# Altium PCB freq_conv_test_unit_pcb.PcbDoc
Units mm, origin at the board's own origin, x right, y up, seen from the top; angles counter-clockwise.
Board outline 201.17 x 122.05 mm, 2 copper layers (Top Layer, Bottom Layer); 15 components, 0 nets, 66 pads, 0 vias.
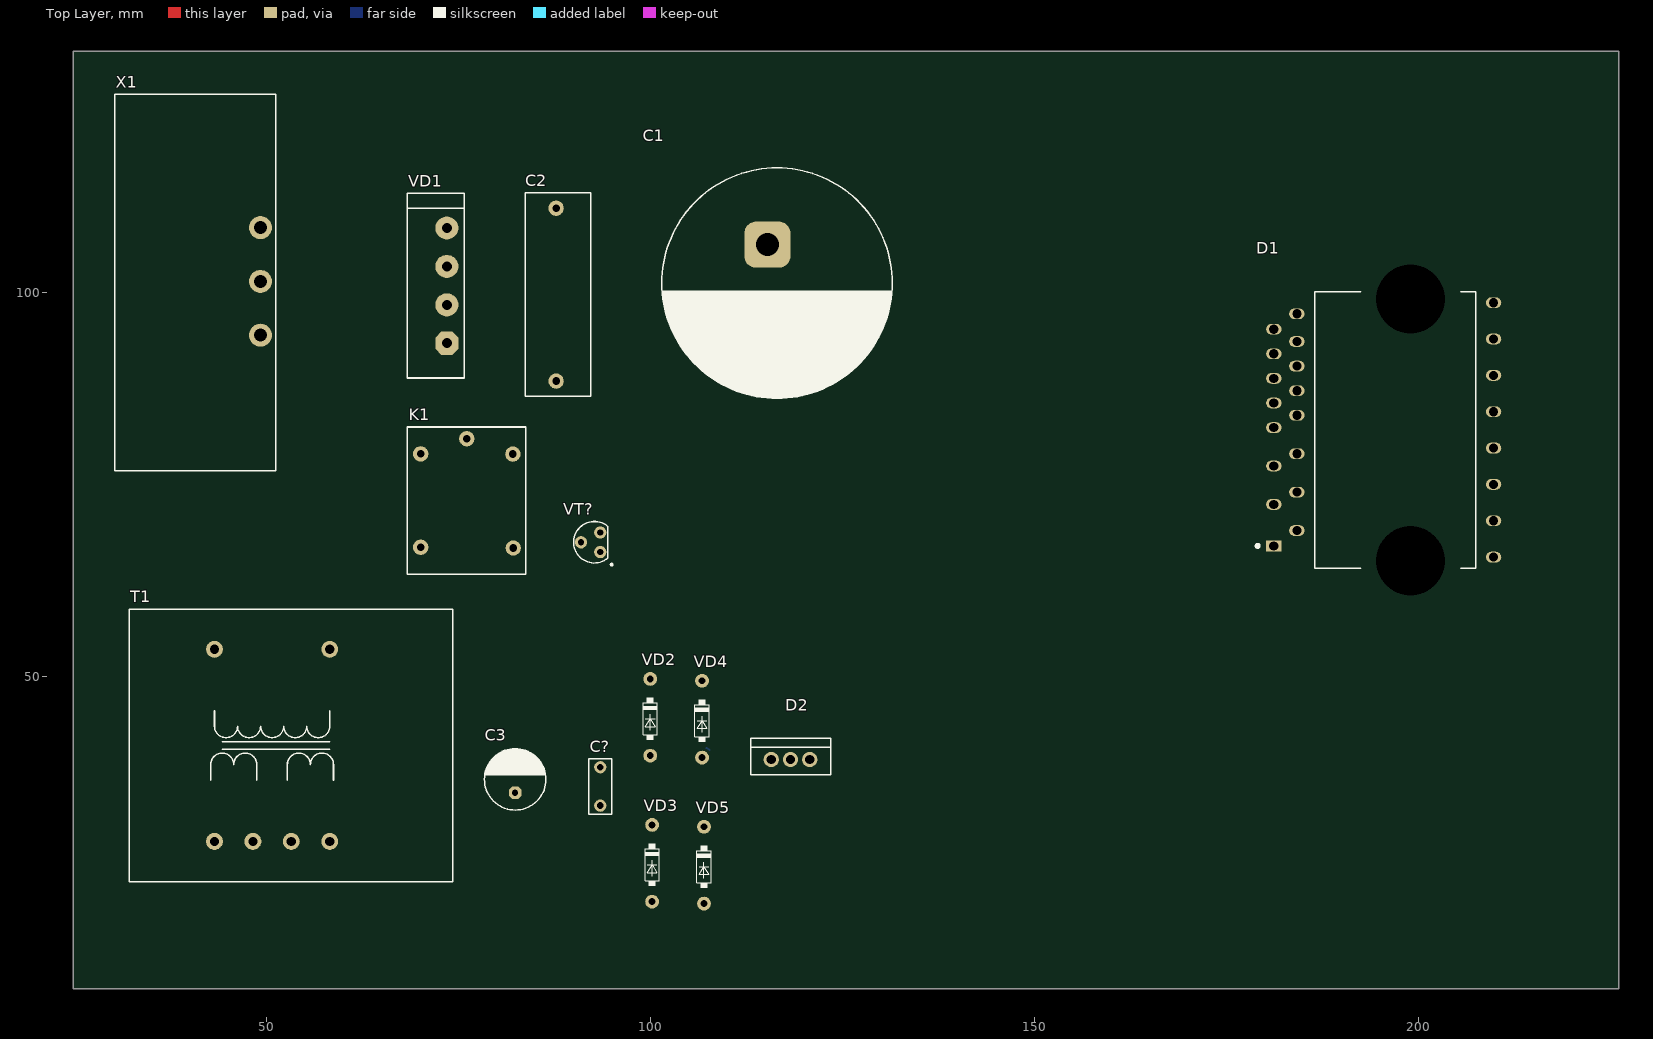
[diagram p0: Top Layer view]
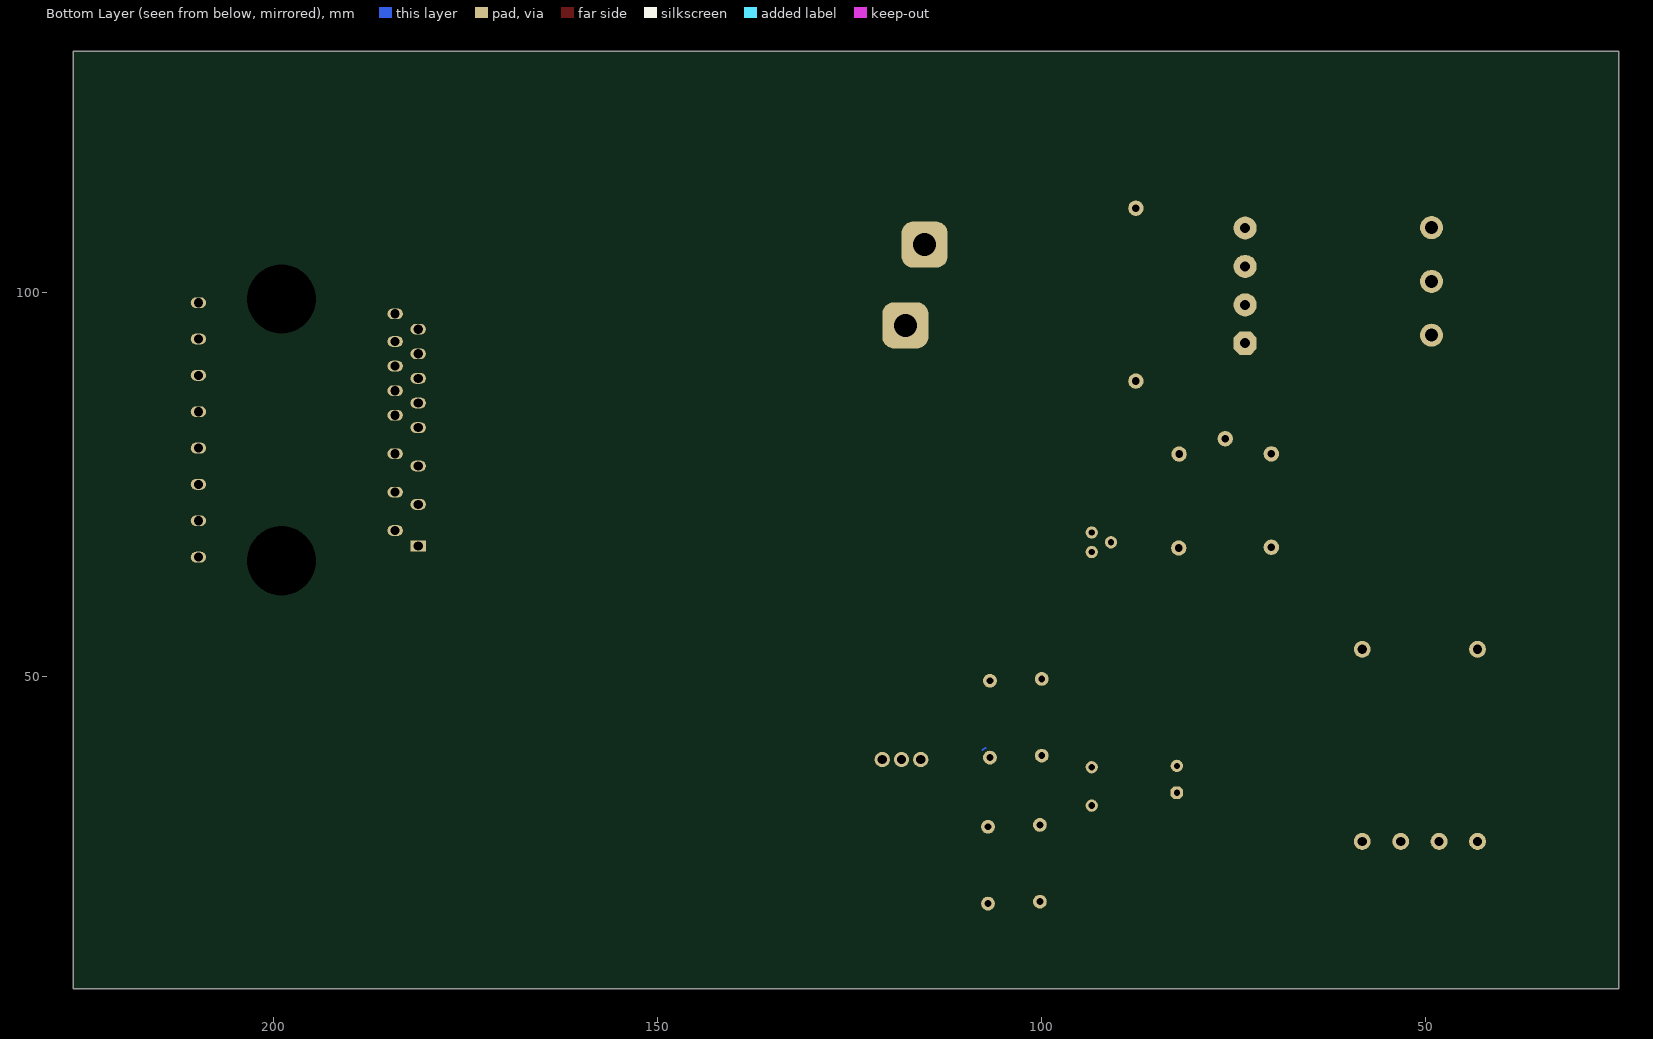
[diagram p1: Bottom Layer view, seen from below]

## Layer stack, top to bottom
Top Solder: solder mask 0.0102, Solder Resist, Dk 3.5
Top Layer: signal copper 0.0356
Dielectric 1: dielectric 0.32, FR-4, Dk 4.8
Bottom Layer: signal copper 0.0356
Bottom Solder: solder mask 0.0102, Solder Resist, Dk 3.5

## Board outline
24.892,9.398 24.892,131.445 226.06,131.445 226.06,9.398

## Design rules (kind name [scope] priority, off if disabled: settings)
AcuteAngle [All] p1: minimum=3.50000000000000E+0001 checktracksonly=FALSE
BoardOutlineClearance "BoardOutlineClearance 1" [All] p1: gap=0.25 ignorepadtopadclearanceinfootprint=FALSE except(0: Arc-SplitContinuation Track-SplitContinuation SMDPad-SplitContinuation THPad-SplitContinuation Via-SplitContinuation Fill-SplitContinuation Poly-SplitContinuation Region-SplitContinuation Text-SplitContinuation) // Milling
BoardOutlineClearance "BoardOutlineClearance 2" [All] p2: gap=0.4 ignorepadtopadclearanceinfootprint=FALSE except(0: Arc-SplitContinuation Track-SplitContinuation SMDPad-SplitContinuation THPad-SplitContinuation Via-SplitContinuation Fill-SplitContinuation Poly-SplitContinuation Region-SplitContinuation Text-SplitContinuation) // V-Cut
Clearance "Clearance 3 Oz" [All] p1: gap=0.35 ignorepadtopadclearanceinfootprint=FALSE except(0.25: Arc-Hole Track-Hole SMDPad-Hole THPad-Hole Via-Hole Fill-Hole Poly-Hole Region-Hole Text-Hole)
Clearance "Clearance 2 Oz" [All] p2: gap=0.3 ignorepadtopadclearanceinfootprint=FALSE except(0.25: Arc-Hole Track-Hole SMDPad-Hole THPad-Hole Via-Hole Fill-Hole Poly-Hole Region-Hole Text-Hole)
Clearance "Clearance-1 1 Oz" [All] p3: gap=0.2 ignorepadtopadclearanceinfootprint=FALSE except(0.25: Arc-Hole Track-Hole SMDPad-Hole THPad-Hole Via-Hole Fill-Hole Poly-Hole Region-Hole Text-Hole) // Standart
Clearance "Clearance-2 1 Oz" [All] p4: gap=0.15 ignorepadtopadclearanceinfootprint=FALSE except(0.2: Arc-Fill Arc-Poly Track-Fill Track-Poly SMDPad-Fill SMDPad-Poly THPad-Fill THPad-Poly Via-Fill Via-Poly Fill-Fill Fill-Poly Poly-Poly; 0.25: Arc-Hole Track-Hole SMDPad-Hole THPad-Hole Via-Hole Fill-Hole Poly-Hole Region-Hole Text-Hole) // Advance
Clearance "Clearance-1 1/2 Oz" [All] p5: gap=0.125 ignorepadtopadclearanceinfootprint=FALSE except(0.2: Arc-Fill Arc-Poly Track-Fill Track-Poly SMDPad-SMDPad SMDPad-Fill SMDPad-Poly THPad-Fill THPad-Poly Via-Fill Via-Poly Fill-Fill Fill-Poly Poly-Poly Poly-Region Poly-Text; 0.25: Arc-Hole Track-Hole SMDPad-Hole THPad-Hole Via-Hole Fill-Hole Poly-Hole Region-Hole Text-Hole) // Standart
Clearance "Clearance-2 1/2 Oz" [All] p6: gap=0.1 ignorepadtopadclearanceinfootprint=FALSE except(0.15: Arc-Fill Arc-Poly Track-Fill Track-Poly SMDPad-SMDPad SMDPad-Fill SMDPad-Poly THPad-Fill THPad-Poly Via-Fill Via-Poly Fill-Fill Fill-Poly Poly-Poly Poly-Region Poly-Text; 0.25: Arc-Hole Track-Hole SMDPad-Hole THPad-Hole Via-Hole Fill-Hole Poly-Hole Region-Hole Text-Hole) // Advance
DiffPairsRouting "DiffPairsRouting 1 Oz" [All] p1: maxlimit=0.254 minlimit=0.2 mostfreqgap=0.254 toplayer_minwidth=0.2 toplayer_maxwidth=0.381 toplayer_prefwidth=0.381 bottomlayer_minwidth=0.2 bottomlayer_maxwidth=0.381 bottomlayer_prefwidth=0.381 maxuncoupledlength=12.7
DiffPairsRouting "DiffPairsRouting 1/2 Oz" [All] p2: maxlimit=0.254 minlimit=0.1 mostfreqgap=0.254 toplayer_minwidth=0.1 toplayer_maxwidth=0.381 toplayer_prefwidth=0.381 bottomlayer_minwidth=0.1 bottomlayer_maxwidth=0.381 bottomlayer_prefwidth=0.381 maxuncoupledlength=12.7
Height [All] p1: minheight=0 maxheight=50 prefheight=12.7
HoleSize "Minimum HoleSize" [IsPad] p1: absolutevalues=TRUE maxlimit=5.9 minlimit=0.6 maxpercent=80.000 minpercent=20.000
HoleSize "Minimum HoleSize VIA 1" [IsVia] p2: absolutevalues=TRUE maxlimit=5.9 minlimit=0.3 maxpercent=80.000 minpercent=20.000 // Standart
HoleSize "Minimum HoleSize VIA 2" [IsVia] p3: absolutevalues=TRUE maxlimit=5.9 minlimit=0.2 maxpercent=80.000 minpercent=20.000 // Advance
HoleToHoleClearance Hole2HoleClearance [All] p1: gap=0.25 allowstackedmicrovias=FALSE
MinimumAnnularRing "Minimum AR VIA Standart" [IsVia] p1: minimumring=0.15
MinimumAnnularRing "Minimum AR PAD Standart" [IsPAD] p2: minimumring=0.2
MinimumAnnularRing "Minimum AR VIA Advance" [IsVia] p3: minimumring=0.1
MinimumAnnularRing "Minimum AR PAD Advance" [IsPAD] p4: minimumring=0.15
MinimumSolderMaskSliver "SolderMask Bridge Standart" [All] p1: minsoldermaskwidth=0.15 // All Masks
MinimumSolderMaskSliver "SolderMask Bridge Advance" [All] p2: minsoldermaskwidth=0.1 // Mask LDI
PlaneClearance "PlaneClearance 3 Oz" [All] p1: clearance=0.35
PlaneClearance "PlaneClearance 2 Oz" [All] p2: clearance=0.3
PlaneClearance "PlaneClearance 1 Oz" [All] p3: clearance=0.2
PlaneClearance "PlaneClearance-1 1/2 Oz" [All] p4: clearance=0.2 // Standart
PlaneClearance "PlaneClearance-2 1/2 Oz" [All] p5: clearance=0.15 // Advance
PlaneConnect "TermalConnect 3 Oz" [All] p1: planeconnectstyle=Relief reliefexpansion=0.2 reliefentries=4 reliefconductorwidth=0.35 reliefairgap=0.35 // Standart
PlaneConnect "TermalConnect 2 Oz" [All] p2: planeconnectstyle=Relief reliefexpansion=0.2 reliefentries=4 reliefconductorwidth=0.3 reliefairgap=0.3 // Standart
PlaneConnect "TermalConnect-1 1 Oz" [All] p3: planeconnectstyle=Relief reliefexpansion=0.2 reliefentries=4 reliefconductorwidth=0.2 reliefairgap=0.2 // Standart
PlaneConnect "TermalConnect-2 1 Oz" [All] p4: pad.planeconnectstyle=Relief pad.reliefexpansion=0.15 pad.reliefentries=4 pad.reliefconductorwidth=0.2 pad.reliefairgap=0.2 via.planeconnectstyle=Direct via.reliefexpansion=0.15 via.reliefentries=4 via.reliefconductorwidth=0.15 via.reliefairgap=0.15 // Advance
PlaneConnect "TermalConnect-1 1/2 Oz" [All] p5: planeconnectstyle=Relief reliefexpansion=0.2 reliefentries=4 reliefconductorwidth=0.2 reliefairgap=0.2 // Standart
PlaneConnect "TermalConnect-2 1/2 Oz" [All] p6: pad.planeconnectstyle=Relief pad.reliefexpansion=0.15 pad.reliefentries=4 pad.reliefconductorwidth=0.15 pad.reliefairgap=0.15 via.planeconnectstyle=Direct via.reliefexpansion=0.15 via.reliefentries=4 via.reliefconductorwidth=0.15 via.reliefairgap=0.15 // Advance
PolygonConnect "PolygonConnect 3 Oz" [All] p1: thpad.connectstyle=Relief thpad.reliefconductorwidth=0.35 thpad.reliefentries=4 thpad.polygonreliefangle="90 Angle" thpad.airgapwidth=0.35 smdpad.connectstyle=Relief smdpad.reliefconductorwidth=0.35 smdpad.reliefentries=4 smdpad.polygonreliefangle="90 Angle" smdpad.airgapwidth=0.35 via.connectstyle=Direct via.reliefconductorwidth=0.254 via.reliefentries=4 via.polygonreliefangle="90 Angle" via.airgapwidth=0.254
PolygonConnect "PolygonConnect 2 Oz" [All] p2: thpad.connectstyle=Relief thpad.reliefconductorwidth=0.3 thpad.reliefentries=4 thpad.polygonreliefangle="90 Angle" thpad.airgapwidth=0.3 smdpad.connectstyle=Relief smdpad.reliefconductorwidth=0.3 smdpad.reliefentries=4 smdpad.polygonreliefangle="90 Angle" smdpad.airgapwidth=0.3 via.connectstyle=Direct via.reliefconductorwidth=0.254 via.reliefentries=4 via.polygonreliefangle="90 Angle" via.airgapwidth=0.254
PolygonConnect "PolygonConnect-1 1 Oz" [All] p3: thpad.connectstyle=Relief thpad.reliefconductorwidth=0.2 thpad.reliefentries=4 thpad.polygonreliefangle="90 Angle" thpad.airgapwidth=0.2 smdpad.connectstyle=Relief smdpad.reliefconductorwidth=0.2 smdpad.reliefentries=4 smdpad.polygonreliefangle="90 Angle" smdpad.airgapwidth=0.2 via.connectstyle=Direct via.reliefconductorwidth=0.254 via.reliefentries=4 via.polygonreliefangle="90 Angle" via.airgapwidth=0.254 // Standart
PolygonConnect "PolygonConnect-2 1 Oz" [All] p4: thpad.connectstyle=Relief thpad.reliefconductorwidth=0.15 thpad.reliefentries=4 thpad.polygonreliefangle="90 Angle" thpad.airgapwidth=0.15 smdpad.connectstyle=Relief smdpad.reliefconductorwidth=0.15 smdpad.reliefentries=4 smdpad.polygonreliefangle="90 Angle" smdpad.airgapwidth=0.15 via.connectstyle=Direct via.reliefconductorwidth=0.254 via.reliefentries=4 via.polygonreliefangle="90 Angle" via.airgapwidth=0.254 // Advance
PolygonConnect "PolygonConnect-1 1/2 Oz" [All] p5: thpad.connectstyle=Relief thpad.reliefconductorwidth=0.15 thpad.reliefentries=4 thpad.polygonreliefangle="90 Angle" thpad.airgapwidth=0.2 smdpad.connectstyle=Relief smdpad.reliefconductorwidth=0.2 smdpad.reliefentries=4 smdpad.polygonreliefangle="90 Angle" smdpad.airgapwidth=0.2 via.connectstyle=Direct via.reliefconductorwidth=0.254 via.reliefentries=4 via.polygonreliefangle="90 Angle" via.airgapwidth=0.254 // Standart
PolygonConnect "PolygonConnect-2 1/2 Oz" [All] p6: thpad.connectstyle=Relief thpad.reliefconductorwidth=0.125 thpad.reliefentries=4 thpad.polygonreliefangle="90 Angle" thpad.airgapwidth=0.15 smdpad.connectstyle=Relief smdpad.reliefconductorwidth=0.125 smdpad.reliefentries=4 smdpad.polygonreliefangle="90 Angle" smdpad.airgapwidth=0.15 via.connectstyle=Direct via.reliefconductorwidth=0.254 via.reliefentries=4 via.polygonreliefangle="90 Angle" via.airgapwidth=0.254 // Advance
RoutingCorners [All] p1 off: cornerstyle=45-Degree minsetback=2.54 maxsetback=2.54
RoutingVias [All] p1: holewidth=0.3 width=0.6 viastyle="Through Hole" minholewidth=0.2 minwidth=0.4 maxholewidth=5.9 maxwidth=6.4
SilkToSilkClearance Silk2SilkClearance [All] p1 off: silktosilkclearance=0.15
SilkToSolderMaskClearance Silk2SolderMaskClearance [IsPad] p1 off: minsilkscreentomaskgap=0.15 clearancetoexposedcopper=TRUE
SolderMaskExpansion SolderMaskExpansion-1 [All] p1: expansion=0.05 istentingtop=FALSE // Standart
SolderMaskExpansion "SolderMaskExpansion LDI" [All] p2: expansion=0.025 istentingtop=FALSE // Advance
UnRoutedNet [All] p1: checkbadconnections=TRUE
Width "Width 3 Oz" [All] p1: maxlimit=10 minlimit=0.35 preferedwidth=0.4 checkconnectedcopper=TRUE
Width "Width 2 Oz" [All] p2: maxlimit=10 minlimit=0.3 preferedwidth=0.35 minimp=50.000000 maximp=50.000000 favimp=50.000000 checkconnectedcopper=TRUE
Width "Width 1 Oz" [All] p3: maxlimit=10 minlimit=0.15 preferedwidth=0.2 checkconnectedcopper=TRUE
Width "Width 1/2 Oz" [All] p4: maxlimit=10 minlimit=0.1 preferedwidth=0.125 checkconnectedcopper=TRUE
19 further rules are at their usual default settings.

## Components (designator, comment, footprint, x,y, rotation, side; value= is the part's Value field where it differs from the comment)
C1 "Aluminium capacitor, 680μF, 400V, ±20%, ?, 30x10x60 mm, -25...+105°C" "CAP: D30C10H37" 115.25,106.25 r270 top value=680μF
C2 "Film capacitor, 0.1μF, 400VDC, ±10%, ?, 26.5x16.5x8.5 mm, -55...+100°C" "CAP: B32673" 87.75,111 r270 top value=0.1μF
C3 "Aluminium capacitor, 220μF, 25V, ±20%, 54mOhm, 8x12x3.5 mm, -40...+105°C" "CAP: D8C3.5H12" 82.423,36.675 r90 top value=220μF
C? "" "CAP: HOLE 5mm" 93.5,33.25 r90 top value=0.1μF
D1 "600 V, 15 A three-phase intelligent power module, , , 15A, , 450V, -40...+125°C, IKCM15F60GA" "INF-CIPOS MINI" 195.45,82.149 r90 top
D2 "" TO-220F 118.25,39.25 r0 top
K1 "SRD-05VDC-SL-C" SRD-05VDC-SL-C 76,73.5 r90 top
T1 "Transformer, TP112-11" "TRANS: TP-112" 53.281,41.106 r0 top
VD1 "Single phase rectifier, 1000V, 25A, 1.1V, GBJ, Molded plastic, -55...+150°C" "DIODE: KBU6M" 73.533,100.925 r90 top
VD2 "Single diode, 60V, 1A, 650mV, ?, DO-41,  -65…+150°C" "DIODE: DO41" 100,44.75 r90 top
VD3 "Single diode, 60V, 1A, 650mV, ?, DO-41,  -65…+150°C" "DIODE: DO41" 100.25,25.75 r90 top
VD4 "Single diode, 60V, 1A, 650mV, ?, DO-41,  -65…+150°C" "DIODE: DO41" 106.75,44.5 r90 top
VD5 "Single diode, 60V, 1A, 650mV, ?, DO-41,  -65…+150°C" "DIODE: DO41" 107,25.5 r90 top
VT? "NPN transistor, 40V, 1.5A, 190MHz, 1W, 0.5Vmax, 120...200, TO-92, 150°C" SC_TO-92 93.5,67.52 r0 top
X1 "" "CON: AS-205 (K24136)" 49.276,101.473 r90 top

## Footprints (in the part's own frame and the unit in brackets; to place one, negate y for a bottom-side part, rotate by r counter-clockwise, add the part's x,y. Pads: shape width x height; smd on the part's side, far side on the other; paste and mask are expansions set on the pad)
"CAP: B32673" [mm]
  round 2 hole 1: 1(0,0) 2(22.5,0)
  silkscreen extent -2,-4 24.5,4.5, body extent -1.98,-4.25 24.52,4.26, height 16.29
"CAP: D8C3.5H12" [mm]
  oct 1.6x1.6 hole 0.8: 1(-1.75,0)
  round 1.6 hole 0.8: 2(1.75,0)
  silkscreen extent -4,-4 4,4, body extent -4.25,-4.25 4.25,4.25, height 13
"CAP: D30C10H37" [mm]
  rrect50% 6x6 hole 3: 1(0,0) 2(10.5,2.5)
  silkscreen extent -10,-13.8 20,16.25, body extent -12.7,-16.47 22.61,18.84, height 36.83
"CAP: HOLE 5mm" [mm]
  round 1.6 hole 0.9: 1(0,0) 2(5,0)
  silkscreen extent -1.1,-1.5 6.1,1.5, body extent -0.5,-1.05 5.5,1.05, height 8.1
"CON: AS-205 (K24136)" [mm]
  round 3 hole 1.7 mask+0.075: 1(-7,0) 2(0,0) 3(7,0)
  silkscreen extent -24.65,-2 24.35,18.97, body extent -24.6,-2.05 24.4,18.95, height 1.3
"DIODE: DO41" [mm]
  round 1.8 hole 0.9: 1(-5,0) 2(5,0)
  silkscreen extent -2.91,-0.91 2.52,0.96, body extent -5.41,-1.36 5.45,1.36, height 4.36
"DIODE: KBU6M" [mm]
  oct 3x3 hole 1.3: 1(-7.5,0)
  round 3 hole 1.3: 2(-2.5,0) 3(7.5,0) 4(2.5,0)
  silkscreen extent -12.03,-2.25 12.03,5.15, body extent -11.85,-2.1 11.85,5, height 19.8
"INF-CIPOS MINI" [mm] "CIPOS MINI;24 pin, 21mm W X 36mm L X 5.6mm H body"
  rect 1.4x2 hole 1.2 paste+0 mask+0: 1(-15.1,14.3)
  oval 1.4x2 hole 1.2 paste+0 mask+0: 2(-13.1,11.3) 3(-9.7,14.3) 4(-8.1,11.3) 5(-4.7,14.3) 6(-3.1,11.3) 7(0.3,14.3) 8(1.9,11.3) 9(3.5,14.3) 10(5.1,11.3) 11(6.7,14.3) 12(8.3,11.3) 13(9.9,14.3) 14(11.5,11.3) 15(13.1,14.3) 16(15.1,11.3) 17(16.555,-14.3) 18(11.825,-14.3) 19(7.095,-14.3) 20(2.365,-14.3) 21(-2.365,-14.3) 22(-7.095,-14.3) 23(-11.825,-14.3) 24(-16.555,-14.3)
  round 0 hole 9 unplated paste+0 mask+0: ""(-17.025,-3.5) ""(17.025,-3.5)
  silkscreen extent -18,-12 18,16.6, body extent -18,-14.56 18,14.56, height 5.61
SC_TO-92 [mm] "TO, Flat Index; 3 In-Line, Axial Leads; Body Dia. 5mm; Leads 0.55 x 0.50 mm (max)"
  round 1.6 hole 0.8: 1(0,-1.27) 2(-2.505,0) 3(0,1.27)
  silkscreen extent -3.47,-3.02 1.61,2.71, body extent -5.05,-2.46 0.19,2.54, height 10
SRD-05VDC-SL-C [mm]
  round 2 hole 1: 1(5.5,-6.125) 2(-6.725,-6.175) 3(-6.625,5.875) 4(5.525,5.875) 5(7.5,-0.125)
  silkscreen extent -10.15,-7.83 9.03,7.6, body extent -10.17,-7.88 8.93,7.62, height 16.4
TO-220F [mm]
  round 2 hole 1.2: 1(-2.5,0) 2(0,0) 3(2.5,0)
  silkscreen extent -5.15,-1.95 5.25,2.8, body extent -5,-1.6 5.14,3.1, height 19.57
"TRANS: TP-112" [mm]
  round 2.2 hole 1.2: 1(-9.988,12.488) 4(5.012,12.488) 7(5.012,-12.512) 8(0.012,-12.512) 9(-4.988,-12.512) 10(-9.988,-12.512)
  silkscreen extent -21.06,-17.74 21.01,17.71, body extent -20.99,-17.79 21.01,17.71, height 41.5

## Part data
C1: library part Aluminium, Manufacturer="JB Capacitors", Package="30x10x60 mm", PartNumber=JNE2G681M10003000600, Temperature=-25...+105°C, Tolerance=±20%, TypeCapacitor="Aluminium capacitor", Voltage=400V, HelpURL=https://www.chipdip.ru/product0/9000565973, Impedance=?, Price Ali=853, Price ChipDip=700, ValueManufacturerPartNumber="Aluminium capacitor, 680μF, 400V, ±20%, ?, 30x10x60 mm, -25...+105°C"
C2: library part Film, Manufacturer=Epcos, Package="26.5x16.5x8.5 mm", PartNumber=B32683A4104J000, Temperature=-55...+100°C, Tolerance=±10%, TypeCapacitor="Film capacitor", Voltage=400VDC, HelpURL=https://www.chipdip.ru/product0/9000614069, Impedance=?, Price Ali=90, Price ChipDip=160, ValueManufacturerPartNumber="Film capacitor, 0.1μF, 400VDC, ±10%, ?, 26.5x16.5x8.5 mm, -55...+100°C"
C3: library part Aluminium, Manufacturer=?, Package="8x12x3.5 mm", PartNumber=9000565901, Temperature=-40...+105°C, Tolerance=±20%, TypeCapacitor="Aluminium capacitor", Voltage=25V, HelpURL=https://www.chipdip.ru/product0/9000565901, Impedance=54mOhm, Price ChipDip=13, ValueManufacturerPartNumber="Aluminium capacitor, 220μF, 25V, ±20%, 54mOhm, 8x12x3.5 mm, -40...+105°C"
C?: library part Ceramic, TypeCapacitor="Ceramic capacitor"
D1: library part IKCM15F60GA, "Fully isolated Dual In-Line molded  IGBT module", CurrentOutput=15A, Manufacturer="INFINEON TECHNOLOGIES AG.", Temperature=-40...+125°C, VoltageSupply=450V, ComponentType="600 V, 15 A three-phase intelligent power module", HelpURL=https://www.infineon.com/cms/en/product/power/intelligent-power-modules-ipm/ikcm15f60ga/, Package=IKCM15F60GA, PartNumber=IKCM15F60GA, Price Ali=700, Price ChipDip=3120, ValueManufacturerPartNumber="600 V, 15 A three-phase intelligent power module, , , 15A, , 450V, -40...+125°C, IKCM15F60GA"
D2: library part LM317, "Adjustable voltage regulator", CurrentOutput=1.5A, Manufacturer=STMicroelectronics, Package=TO-220SG, PartNumber=LM317T, Temperature=0...125°C, VoltageInput=1.2…37V, ComponentType="Adjustable voltage regulator", HelpURL=https://www.chipdip.ru/product/lm317t, Price ChipDip=60
K1: Coil Voltage=5VDC, CurrentMax=10A, Manufacturer="Ningbo Songle Relay", Switching Voltage="(250VAC , 110VDC) Max", HelpURL=https://www.chipdip.ru/product0/8001965486?from=suggest_product, PartNumber=SRD-05VDC-SL-C, Price ChipDip=160
T1: library part TP-112, Manufacturer=Epcos, Package=TP112-11, PartNumber=ТП112-11, HelpURL=https://www.chipdip.ru/product/tp112-11?from=suggest_product, Price ChipDip=550, TypeTransformer=Transformer, ValueManufacturerPartNumber="Transformer, TP112-11"
VD1: library part "1PH rectifier", Current=25A, Manufacturer=SMC, Package="GBJ, Molded plastic", PartNumber=GBJ2510, Temperature=-55...+150°C, Voltage=1000V, VoltageDrop=1.1V, HelpURL=https://www.infinite-electronic.ru/datasheet/5a-GBJ2506TB.pdf, Price Ali=79, Price ChipDip=71, TypeDiode="Single phase rectifier", ValueManufacturerPartNumber="Single phase rectifier, 1000V, 25A, 1.1V, GBJ, Molded plastic, -55...+150°C"
VD2 VD3 VD4 VD5: library part Diode_single, Current=1A, Manufacturer="VISHAY INTERTECHNOLOGY INC.", Package=DO-41, PartNumber=SB160-E3/54, Temperature=-65…+150°C, Voltage=60V, VoltageDrop=650mV, HelpURL=https://www.digikey.com/product-detail/en/stmicroelectronics/1N5819/497-6610-1-ND/1865421, Price ChipDip=32, RecoveryTime=?, TypeDiode="Single diode", ValueManufacturerPartNumber="Single diode, 60V, 1A, 650mV, ?, DO-41,  -65…+150°C"
VT?: library part SS8050CBU, CurrentCE=1.5A, CurrentGain=120...200, Frequency=190MHz, Manufacturer="ON Semiconductor", MaxPower=1W, Package=TO-92, Temperature=150°C, VoltageCE=40V, VoltageSaturation=0.5Vmax, HelpURL=https://www.chipdip.ru/product/s8050, PartNumber=SS8050CBU, Price ChipDip=19, TypeTransistor="NPN transistor", ValueManufacturerPartNumber="NPN transistor, 40V, 1.5A, 190MHz, 1W, 0.5Vmax, 120...200, TO-92, 150°C"
X1: library part "Terminal block 3", CurrentMax="10 A", Manufacturer="Dragon City Industries", CommentText="\"Разъем\"", HelpURL=https://static.chipdip.ru/lib/550/DOC014550304.pdf, Multichannel=3pin, Price ChipDip=150, TypeConnector="Connector 220V"

## Nets (pads, with @x,y where several pads share a name; then routed paths per layer and width w, separated by ;. In a path a pad name is that pad's centre, name@x,y a point inside that pad or via, vN(x,y) a via of type N, cw(c..) or ccw(c..) an arc to the next point about the centre after c; other vN are vias at no path point)
pads on no net: C1.1 C1.2 C2.1 C2.2 C3.1 C3.2 C?.1 C?.2 D1. D1.1 D1.2 D1.3 D1.4 D1.5 D1.6 D1.7 D1.8 D1.9 D1.10 D1.11 D1.12 D1.13 D1.14 D1.15 D1.16 D1.17 D1.18 D1.19 D1.20 D1.21 D1.22 D1.23 D1.24 D2.1 D2.2 D2.3 K1.1 K1.2 K1.3 K1.4 K1.5 T1.1 T1.4 T1.7 T1.8 T1.9 T1.10 VD1.1 VD1.2 VD1.3 VD1.4 VD2.1 VD2.2 VD3.1 VD3.2 VD4.1 VD4.2 VD5.1 VD5.2 VT?.1 VT?.2 VT?.3 X1.1 X1.2 X1.3
copper on no net: | length 0.5
  Bottom Layer w0.254: 107.299,40.763 cw(c106.75,39.5) 107.724,40.474